# Altium PCB PCB1.PcbDoc
Units mm, origin at the board's own origin, x right, y up, seen from the top; angles counter-clockwise.
Board outline 65 x 30 mm, 4 copper layers (Top Layer, L2_GND, L3_PWR, Bottom Layer), stack 1.57 mm thick; 40 components, 29 nets, 160 pads, 43 vias.
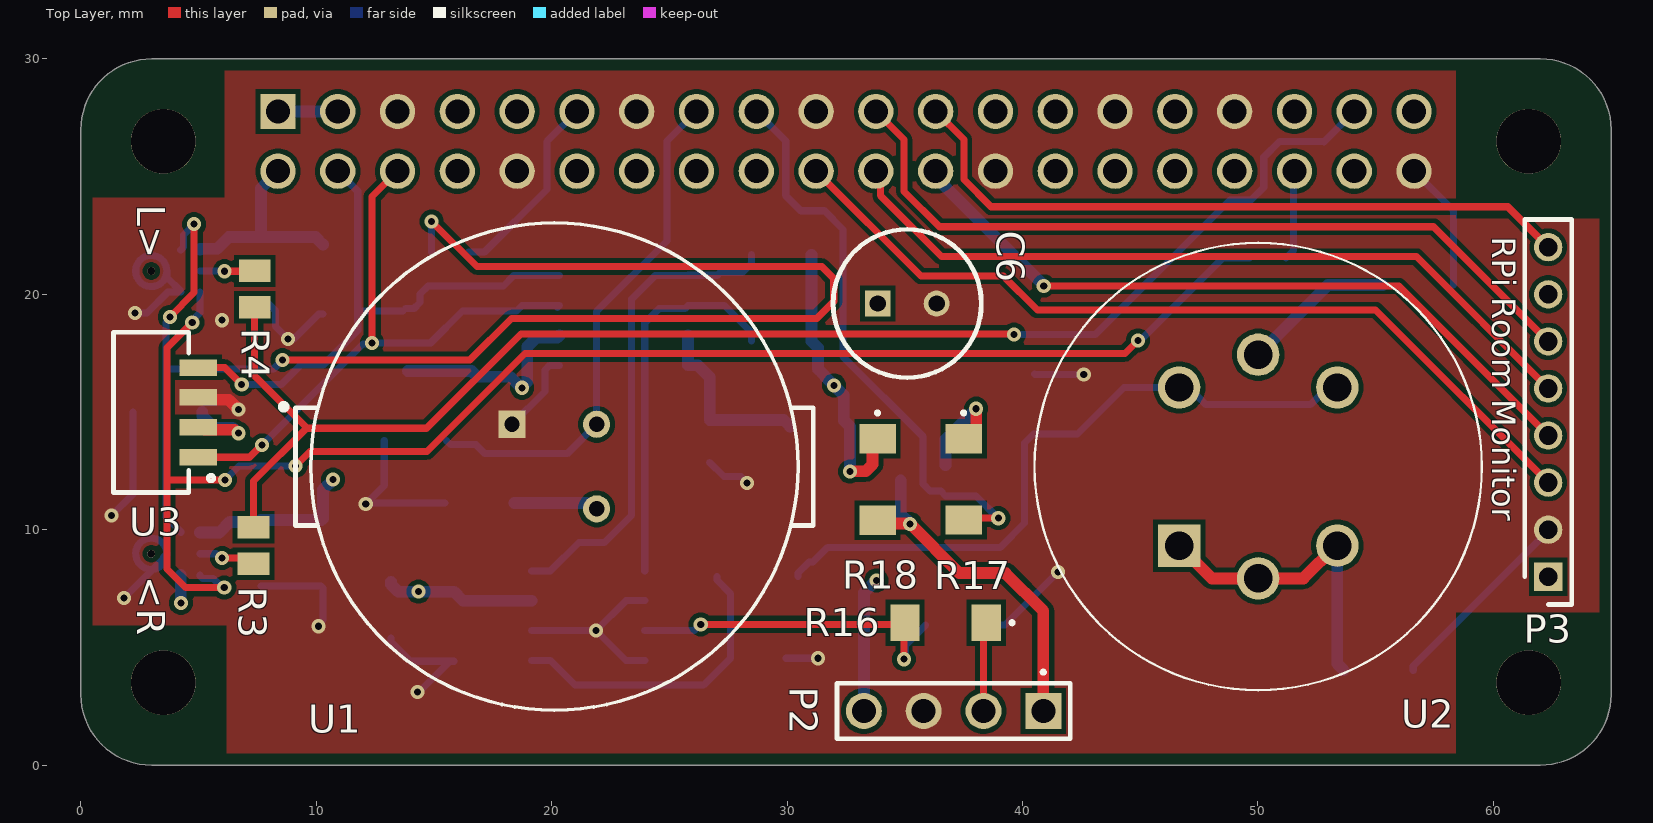
[diagram p0: Top Layer view]
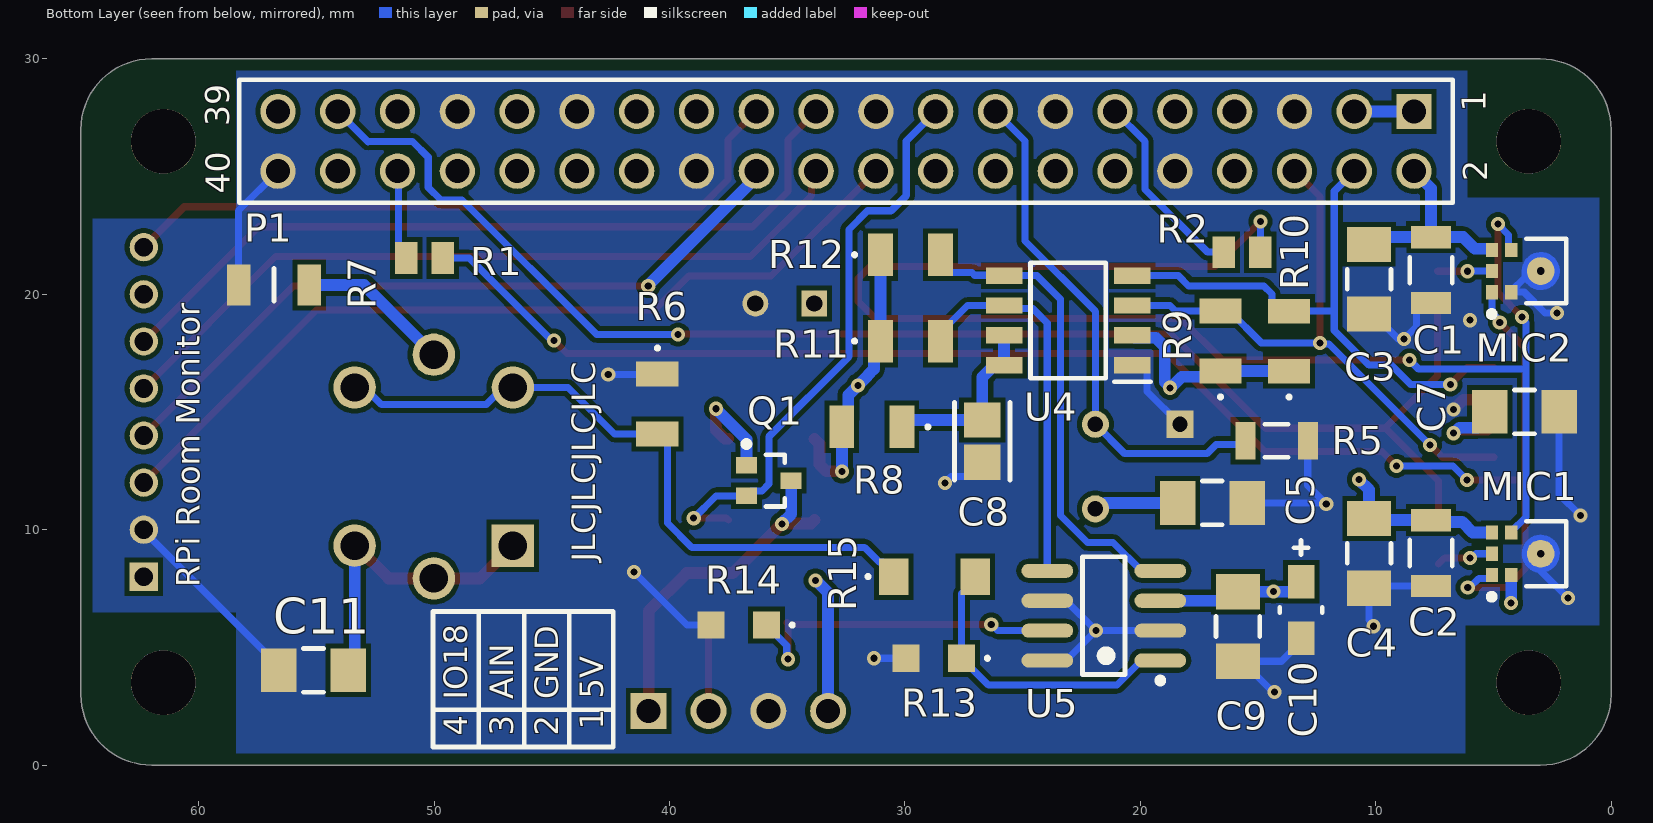
[diagram p1: Bottom Layer view, seen from below]
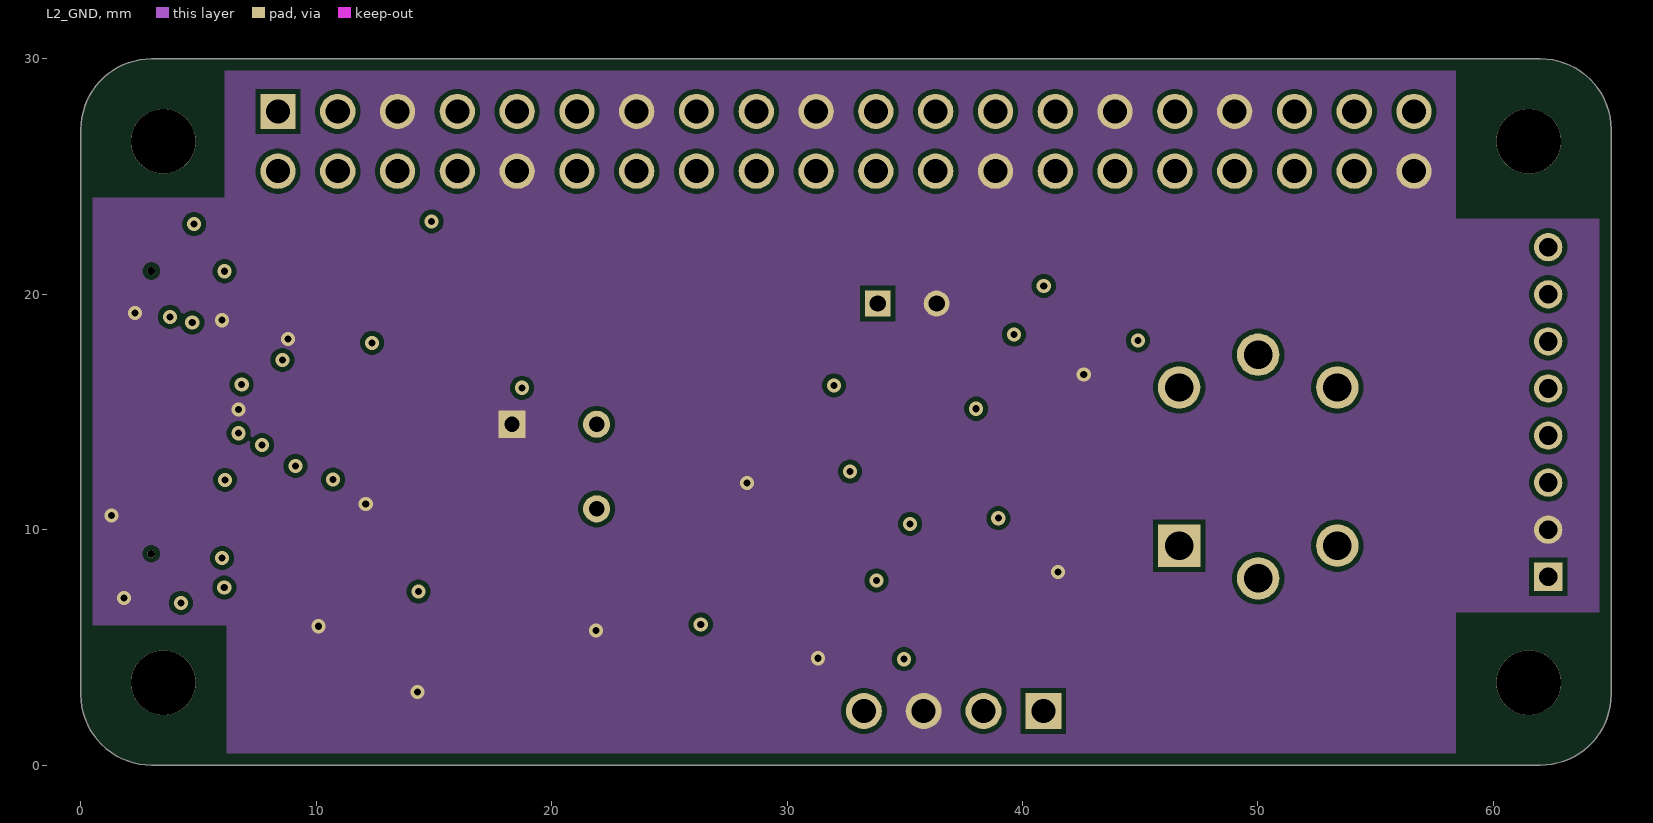
[diagram p2: L2_GND]
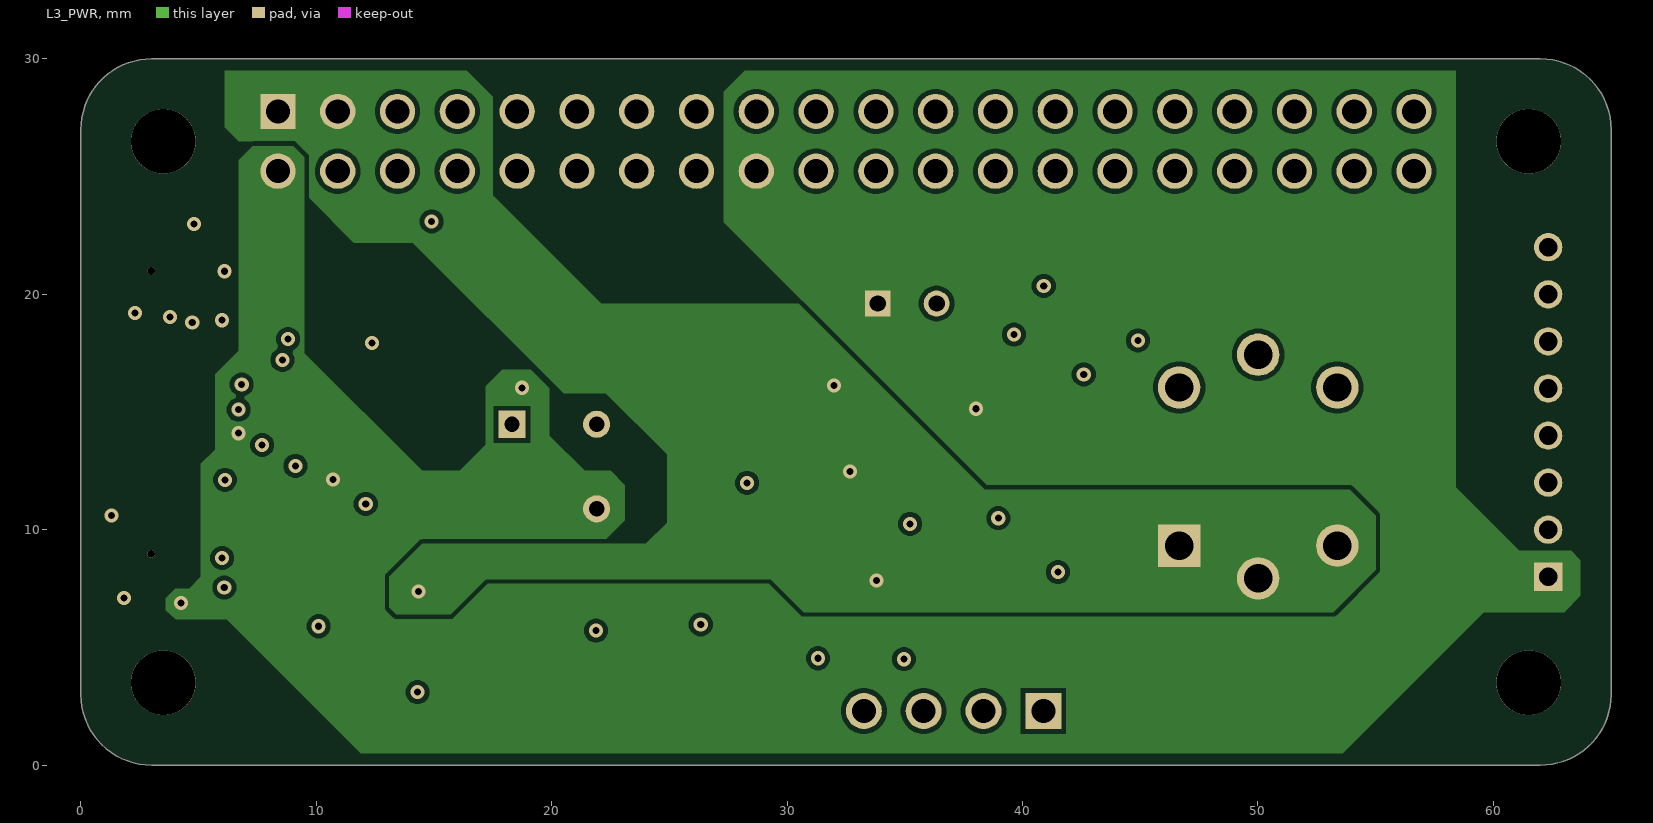
[diagram p3: L3_PWR]
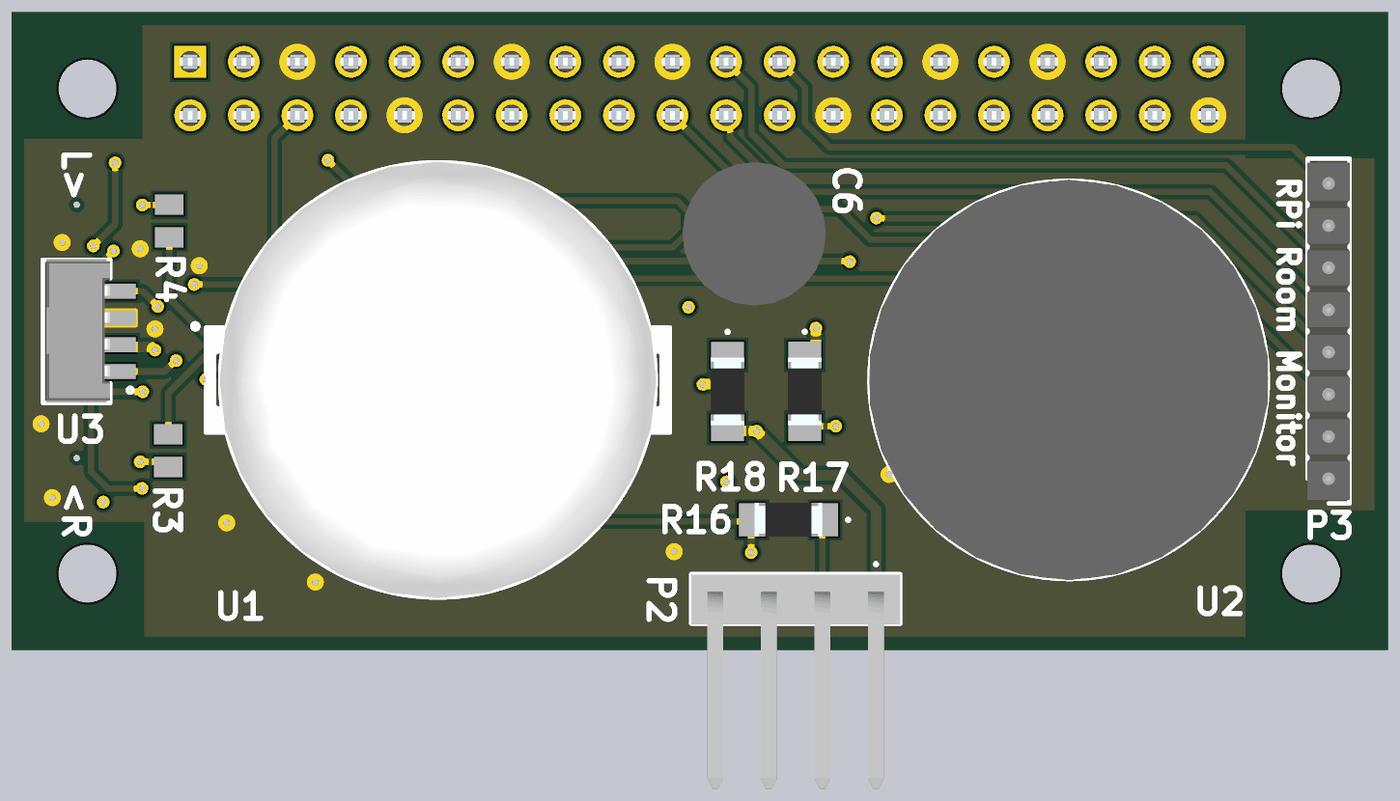
[diagram p4: 3D render of the assembled board from above, using the file's embedded part models]
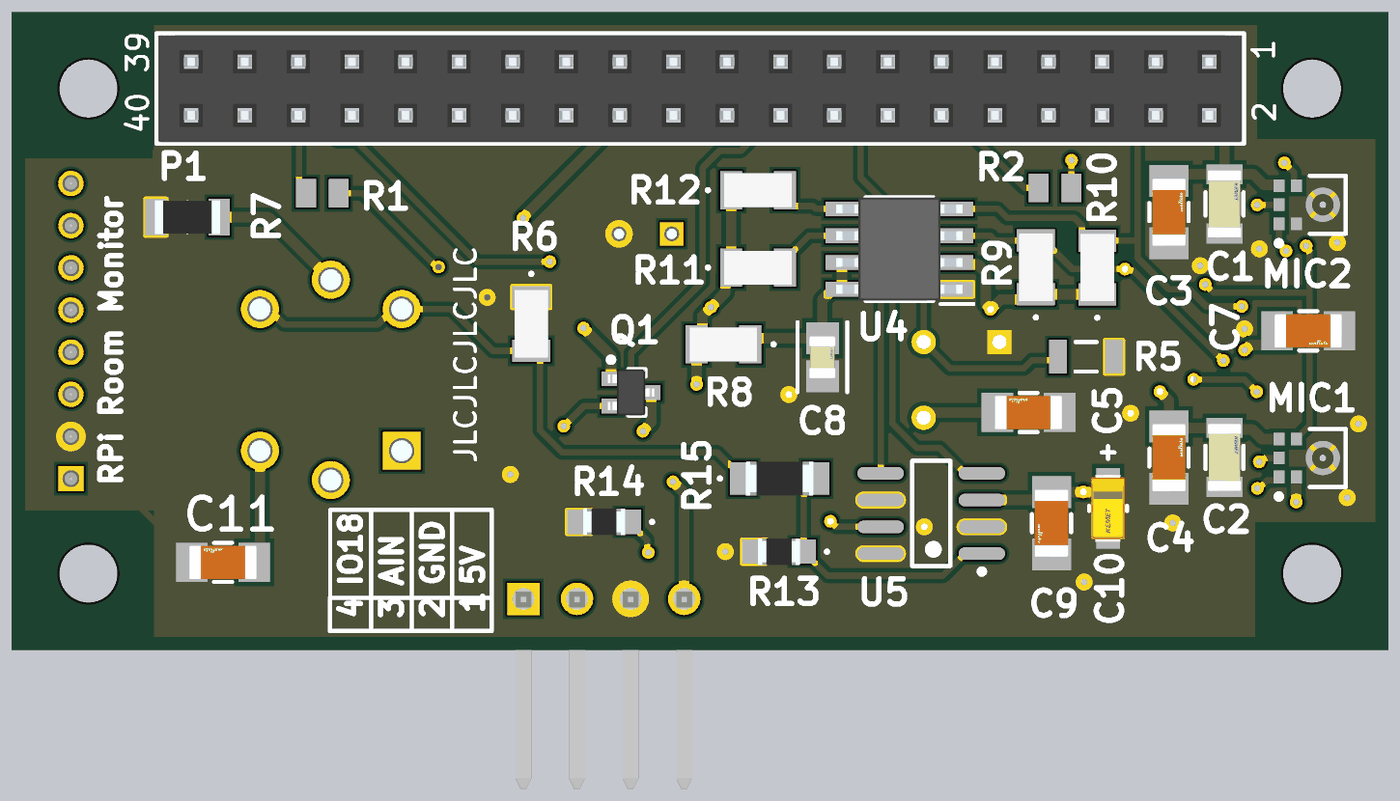
[diagram p5: 3D render of the assembled board from below, using the file's embedded part models]

## Layer stack, top to bottom
Top Solder: solder mask 0.015, Solder Resist, Dk 3.8
Top Layer: signal copper 0.035
Dielectric 2: prepreg 0.2, 7628, Dk 4.6
L2_GND: signal copper 0.0175
Dielectric 1: dielectric 1.065, FR-4, Dk 4.5
L3_PWR: signal copper 0.0175
Dielectric 3: prepreg 0.2, 7628, Dk 4.6
Bottom Layer: signal copper 0.035
Bottom Solder: solder mask 0.015, Solder Resist, Dk 3.8

## Board outline
0,3 0,27 cw(c3,27) 3,30 62,30 cw(c62,27) 65,27 65,3 cw(c62,3) 62,0 3,0 cw(c3,3)

## Design rules (kind name [scope] priority, off if disabled: settings)
BoardOutlineClearance [All] p1: gap=0.2 ignorepadtopadclearanceinfootprint=FALSE except(0.4: Arc-SplitBarrior Arc-SplitContinuation Track-SplitBarrior Track-SplitContinuation SMDPad-SplitBarrior SMDPad-SplitContinuation THPad-SplitBarrior THPad-SplitContinuation Via-SplitBarrior Via-SplitContinuation Fill-SplitBarrior Fill-SplitContinuation Poly-SplitBarrior Poly-SplitContinuation Region-SplitBarrior Region-SplitContinuation Text-SplitBarrior Text-SplitContinuation)
Clearance "Clearance Bottom Layer" [OnLayer('Bottom Layer')] p1: gap=0.2 ignorepadtopadclearanceinfootprint=TRUE except(0.254: Arc-Text Track-Text SMDPad-Text THPad-Text Via-Text Fill-Text Poly-Text Region-Text Text-Text)
Clearance "Clearance Top Layer" [OnLayer('Top Layer')] p2: gap=0.2 ignorepadtopadclearanceinfootprint=TRUE except(0.254: Arc-Text Track-Text SMDPad-Text THPad-Text Via-Text Fill-Text Poly-Text Region-Text Text-Text)
Clearance [All] p3: gap=0.2 ignorepadtopadclearanceinfootprint=FALSE except(0.089: Arc-Arc Arc-Track Arc-SMDPad Track-Track Track-SMDPad SMDPad-SMDPad; 0.127: Arc-Via Track-Via SMDPad-Via THPad-Via Via-Via; 0.254: Arc-Text Track-Text SMDPad-Text THPad-Text Via-Text Fill-Text Poly-Text Region-Text Text-Text)
HoleSize [All] p1: absolutevalues=TRUE maxlimit=6.3 minlimit=0.2 maxpercent=80.000 minpercent=20.000
MinimumAnnularRing [All] p1: minimumring=0.076
MinimumSolderMaskSliver [All] p1: minsoldermaskwidth=0.1
PlaneConnect [All] p1: planeconnectstyle=Direct reliefexpansion=0.508 reliefentries=4 reliefconductorwidth=0.254 reliefairgap=0.254
PolygonConnect PolygonConnect_1 [All] p1: connectstyle=Direct reliefconductorwidth=0.508 reliefentries=4 polygonreliefangle="90 Angle" airgapwidth=0.254
RoutingCorners [All] p1: cornerstyle=Round minsetback=2.54 maxsetback=2.54
RoutingVias [All] p1: holewidth=0.5 width=1 viastyle="Through Hole" minholewidth=0.2 minwidth=0.45 maxholewidth=1 maxwidth=2
SilkToSilkClearance [All] p1: silktosilkclearance=0.1
SilkToSolderMaskClearance [IsPad] p1: minsilkscreentomaskgap=0.1 clearancetoexposedcopper=TRUE
SolderMaskExpansion [All] p1: expansion=0.102 istentingtop=FALSE
Width [All] p1: maxlimit=2.54 minlimit=0.089 preferedwidth=0.381
24 further rules are at their usual default settings.

## Components (designator, comment, footprint, x,y, rotation, side; value= is the part's Value field where it differs from the comment)
C1 "C1206C201F4HACTU" FP-C1206C-EB-MFG 7.65,21.03 r270 bottom
C2 "C1206C201F4HACTU" FP-C1206C-EB-MFG 7.65,9.01 r270 bottom
C3 "GRM3195C1H104GA05D" FP-GRM319-0_15-IPC_A 10.28,20.64 r90 bottom
C4 "GRM3195C1H104GA05D" FP-GRM319-0_15-IPC_A 10.28,9 r90 bottom
C5 "GRM3195C1H104GA05D" FP-GRM319-0_15-IPC_A 16.94,11.14 r0 bottom
C6 "ECE-A0JKS101B" CAPPRD250W50D630H600 33.85,19.61 r0 top
C7 "GRM3195C1H104GA05D" FP-GRM319-0_15-IPC_A 3.68,15.01 r180 bottom
C8 "C0805C101F3HACTU" FP-C0805C-DN-IPC_A 26.71,13.76 r270 bottom
C9 "GRM3195C1H104GA05D" FP-GRM319-0_15-IPC_A 15.85,5.89 r270 bottom
C10 "T491A106K020AT" FP-T491A106K020AT-MFG 13.17,6.59 r90 bottom
C11 "GRM3195C1H104GA05D" FP-GRM319-0_15-IPC_A 55.12,4.03 r0 bottom
MIC1 "SPH0645LM4H-B" FP-SPH0645LM4H-B-MFG#1 3.699,8.98 r90 bottom
MIC2 "SPH0645LM4H-B" FP-SPH0645LM4H-B-MFG#2 3.699,20.99 r90 bottom
P1 "61304021821" 61304021821 32.5,26.5 r0 bottom locked
P2 "22-05-2041" 22052041 40.88,2.3 r180 top
P3 "M22-2010805" HDRV8W60P0X200_1X8_1600X200X525P 62.33,8 r90 top
Q1 "BSS138W-7-F" DIOD-SOT323-3_V 35.78,12.09 r180 bottom
R1 "ERJ-6ENF51R0V" RESC2013X70X40LL20T20 50.41,21.54 r180 bottom
R2 "ERJ-6ENF51R0V" RESC2013X70X40LL20T20 15.68,21.79 r180 bottom
R3 "ERJ-6ENF51R0V" RESC2013X70X40LL20T20 7.33,9.33 r90 top
R4 "ERJ-6ENF51R0V" RESC2013X70X40LL20T20 7.38,20.22 r270 top
R5 "RC1206FR-07100KL" RESC3116X65X40LL10T20 14.21,13.78 r180 bottom
R6 "RCC12064K70FKEA" RCC1206_e3 40.51,15.34 r270 bottom
R7 "RC1206JR-7W2RL" RESC3116X65N 56.8,20.4 r0 bottom
R8 "RCC1206200KFKEA" RCC1206_e3 31.4,14.37 r0 bottom
R9 "RCC12062K20FKEA" RCC1206_e3 16.59,18.02 r90 bottom
R10 "RCC12062K20FKEA" RCC1206_e3 13.68,18.01 r90 bottom
R11 "RCC12062K20FKEA" RCC1206_e3 29.76,18.01 r180 bottom
R12 "RCC12062K20FKEA" RCC1206_e3 29.76,21.68 r180 bottom
R13 "ERJ-P06D6801V" ERJP06_(0805) 28.77,4.54 r0 bottom
R14 "ERJ-P06D6801V" ERJP06_(0805) 37.06,5.95 r0 bottom
R15 "ERJ-P08D1002V" ERJP08_(1206) 28.74,8.01 r180 bottom
R16 "ERJ-P08D1002V" ERJP08_(1206) 36.73,6.05 r180 top
R17 "ERJ-P08D1002V" ERJP08_(1206) 37.5,12.14 r270 top
R18 "ERJ-P08D1002V" ERJP08_(1206) 33.84,12.135 r270 top
U1 "EKMC1603111" FP-EKMC1603111-MFG 20.112,12.684 r0 top locked
U2 "SEN-17049" SEN17049 46.651,9.325 r90 top locked
U3 "VEML7700-TT" VEML7700 3.06,15.01 r90 top
U4 "PCA9306D,118" SOIC127P600X175-8N 23.06,18.89 r0 bottom
U5 "MCP3422A1-E/SN" SOIC-SN8_N 21.55,6.35 r0 bottom

## Footprints (in the part's own frame and the unit in brackets; to place one, negate y for a bottom-side part, rotate by r counter-clockwise, add the part's x,y. Pads: shape width x height; smd on the part's side, far side on the other; paste and mask are expansions set on the pad)
22052041 [mm]
  rect 1.53x1.53 hole 1.02: 1(0,0)
  round 1.53 hole 1.02: 2(2.54,0) 3(5.08,0) 4(7.62,0)
  silkscreen extent -1.14,-1.7 8.76,1.18, body extent -1.14,-1.15 8.76,9.02, height 6.3
61304021821 [mm] "Socket Header, Pitch 2.54 mm, THT, Vertical, dual row, 40p"
  rect 1.5x1.5 hole 1.02: 1(-24.13,-1.27)
  round 1.5 hole 1.02: 2(-24.13,1.27) 3(-21.59,-1.27) 4(-21.59,1.27) 5(-19.05,-1.27) 6(-19.05,1.27) 7(-16.51,-1.27) 8(-16.51,1.27) 9(-13.97,-1.27) 10(-13.97,1.27) 11(-11.43,-1.27) 12(-11.43,1.27) 13(-8.89,-1.27) 14(-8.89,1.27) 15(-6.35,-1.27) 16(-6.35,1.27) 17(-3.81,-1.27) 18(-3.81,1.27) 19(-1.27,-1.27) 20(-1.27,1.27) 21(1.27,-1.27) 22(1.27,1.27) 23(3.81,-1.27) 24(3.81,1.27) 25(6.35,-1.27) 26(6.35,1.27) 27(8.89,-1.27) 28(8.89,1.27) 29(11.43,-1.27) 30(11.43,1.27) 31(13.97,-1.27) 32(13.97,1.27) 33(16.51,-1.27) 34(16.51,1.27) 35(19.05,-1.27) 36(19.05,1.27) 37(21.59,-1.27) 38(21.59,1.27) 39(24.13,-1.27) 40(24.13,1.27)
  silkscreen extent -25.78,-2.62 25.78,2.62, body extent -25.65,-2.54 25.65,2.54, height 8.45
CAPPRD250W50D630H600 [mm]
  rect 1.1x1.1 hole 0.7: 1(0,0)
  round 1.1 hole 0.7: 2(2.5,0)
  silkscreen extent -1.9,-3.15 4.4,3.15, body extent -2.15,-3.4 4.65,3.4, height 6
DIOD-SOT323-3_V [mm] "SOT323, 3-Leads, Body 2.2x1.35mm, Pitch 0.65mm"
  rect 0.9x0.7 smd: 1(-0.95,0.65) 2(-0.95,-0.65) 3(0.95,0)
  silkscreen extent -1.08,-1.1 0.67,1.67, body extent -1.1,-1.1 1.1,1.1, height 1.07
ERJP06_(0805) [mm]
  rect 1.15x1.15 smd: 1(-1.175,0) 2(1.175,0)
  silkscreen extent -2.32,-0.05 -2.22,0.05, body extent -1,-0.63 1,0.63, height 0.6
ERJP08_(1206) [mm]
  rect 1.25x1.55 smd: 1(-1.725,0) 2(1.725,0)
  silkscreen extent -2.88,-0.05 -2.78,0.05, body extent -1.6,-0.8 1.6,0.8, height 0.6
FP-C0805C-DN-IPC_A [mm]
  rect 1.505x1.556 smd paste+0 mask+0: 1(-0.901,0) 2(0.901,0)
  silkscreen extent -1.65,-1.18 1.65,1.18, body extent -1,-0.63 1,0.63, height 0.88
FP-C1206C-EB-MFG [mm]
  rect 0.95x1.7 smd paste+0 mask+0: 1(-1.4,0) 2(1.4,0)
  silkscreen extent -0.55,-0.9 0.55,0.9, body extent -1.6,-0.8 1.6,0.8, height 0.88
FP-EKMC1603111-MFG [mm]
  rect 1.15x1.15 hole 0.65 paste-1000 mask+0: 1(-1.796,1.796)
  round 1.15 hole 0.65 paste-1000 mask+0: 2(1.796,1.796) 3(1.796,-1.796)
  silkscreen extent -11.62,-10.35 11,10.35, body extent -11.1,-10.45 11.1,10.45, height 0.25
FP-GRM319-0_15-IPC_A [mm]
  rect 1.506x1.858 smd paste+0 mask+0: 1(-1.476,0) 2(1.476,0)
  silkscreen extent -0.42,-0.93 0.42,0.93, body extent -1.6,-0.8 1.6,0.8, height 0.95
FP-SPH0645LM4H-B-MFG#1 [mm]
  rect 0.6x0.522 smd paste+0 mask+0: 1(-0.9,1.364) 2(-0.9,0.542) 4(0.9,0.542) 5(0.9,1.364) 6(0,1.364)
  round 1.177 smd paste-1000 mask-1000: 3(0,-0.71)
  round 0.325 hole 0.325 unplated paste-1000 mask+0: ""(0,-0.71)
  Top Layer lines w0.3: -0.659,-0.644 ccw(c0,-0.71) 0,-0.048 ccw(c0,-0.71) -0.659,-0.644
  silkscreen extent -1.95,-1.8 1.38,1.5
FP-SPH0645LM4H-B-MFG#2 [mm]
  rect 0.6x0.522 smd paste+0 mask+0: 1(-0.9,1.364) 2(-0.9,0.542) 4(0.9,0.542) 5(0.9,1.364) 6(0,1.364)
  round 1.177 smd paste-1000 mask-1000: 3(0,-0.71)
  round 0.325 hole 0.325 unplated paste-1000 mask+0: ""(0,-0.71)
  Top Layer circle w0.3: c0,-0.71 r0.662
  silkscreen extent -1.95,-1.8 1.38,1.5
FP-T491A106K020AT-MFG [mm]
  rect 1.42x1.13 smd paste+0 mask+0: 1(-1.2,0) 2(1.2,0)
  silkscreen extent -0.12,-0.9 2.95,0.9, body extent -1.6,-0.8 1.6,0.8, height 1.8
HDRV8W60P0X200_1X8_1600X200X525P [mm]
  rect 1.2x1.2 hole 0.8: 1(0,0)
  round 1.2 hole 0.8: 2(2,0) 3(4,0) 4(6,0) 5(8,0) 6(10,0) 7(12,0) 8(14,0)
  silkscreen extent -1.17,-1 15.17,1, body extent -1,-1 15,1, height 5.25
RCC1206_e3 [mm]
  rect 1.05x1.8 smd: 1(-1.275,0) 2(1.275,0)
  silkscreen extent -2.42,-0.05 -2.33,0.05, body extent -1.6,-0.8 1.6,0.8, height 0.55
RESC2013X70X40LL20T20 [mm] "Chip Resistor, 2-Leads, Body 2.00x1.25mm, IPC High Density"
  rect 0.95x1.35 smd: 1(-0.775,0) 2(0.775,0)
  body extent -1.1,-0.72 1.1,0.72, height 0.7
RESC3116X65N [mm]
  rect 1x1.75 smd: 1(-1.5,0) 2(1.5,0)
  silkscreen extent 0,-0.7 0,0.7, body extent -1.55,-0.8 1.55,0.8, height 0.65
RESC3116X65X40LL10T20 [mm] "Chip Resistor, 2-Leads, Body 3.10x1.60mm, IPC High Density"
  rect 0.85x1.6 smd: 1(-1.325,0) 2(1.325,0)
  silkscreen extent -0.5,-0.7 0.5,0.7, body extent -1.6,-0.85 1.6,0.85, height 0.65
SEN17049 [mm]
  rect 1.8x1.8 hole 1.2: 1(0,0)
  round 1.8 hole 1.2: 2(-1.391,-3.359) 3(0,-6.718) 4(6.718,-6.718) 5(8.109,-3.359) 6(6.718,0)
  silkscreen extent -6.14,-12.86 12.86,6.14, body extent -6.14,-12.86 12.86,6.14, height 20.1
SOIC127P600X175-8N [mm]
  rect 1.55x0.7 smd: 1(-2.725,1.905) 2(-2.725,0.635) 3(-2.725,-0.635) 4(-2.725,-1.905) 5(2.725,-1.905) 6(2.725,-0.635) 7(2.725,0.635) 8(2.725,1.905)
  silkscreen extent -3.5,-2.45 1.6,2.61, body extent -3,-2.45 3,2.45, height 1.75
SOIC-SN8_N [mm] "SOIC, 8-Leads, Body 4.9x3.9mm, Pitch 1.27mm, IPC Medium Density"
  oval 2.2x0.6 smd: 1(-2.4,1.905) 2(-2.4,0.635) 3(-2.4,-0.635) 4(-2.4,-1.905) 5(2.4,-1.905) 6(2.4,-0.635) 7(2.4,0.635) 8(2.4,1.905)
  silkscreen extent -2.52,-2.5 0.9,2.88, body extent -2,-2.5 2,2.5, height 1.75
VEML7700 [mm]
  rect 0.7x1.6 smd: 1(-1.93,-1.925) 2(-0.66,-1.925) 3(0.61,-1.925) 4(1.88,-1.925)
  silkscreen extent -3.42,-2.59 3.37,1.68, body extent -3.4,-1.5 3.4,1.5, height 2.36

## Part data
C1 C2: Capacitance=200pF, Manufacturer=KEMET, Supplier Part Number 1=80-C1206C201F4HACTU, Category="Ceramic Capacitors", Manufacturer Part Number=C1206C201F4HACTU, Pricing 1="1=0,41000, 10=0,27900, 50=0,27900, 100=0,16700, 1000=0,11500, 10000=0,09500 (USD)", RoHS=Yes, RoHS Compliant=Yes, Stock 1=3719, Supplier 1=Mouser
C3 C4 C5 C7 C9 C11: "Multi-Layer Ceramic Capacitor 0.1uF C0G 2% 1206 Paper T/R", Capacitance=0.1uF, Manufacturer=Murata, Supplier Part Number 1=81-GRM3195C1H104GA5D, Category="Ceramic Capacitors", Manufacturer Part Number=GRM3195C1H104GA05D, Pricing 1="1=0,69000, 10=0,51100, 50=0,51100, 100=0,35000, 500=0,27800, 1000=0,25100, 2000=0,21300, 10000=0,21300 (USD)", RoHS=Yes, RoHS Compliant=Yes, Stock 1=17820, Supplier 1=Mouser
C6: "Cap Aluminum 100uF 6.3V 20% (6.3 X 5mm) Radial 5mm 71mA 1000 hr 85°C Ammo Pack", Capacitance=100uF, Case/Package=Radial, Manufacturer=Panasonic, Max Operating Temperature=85°C, Min Operating Temperature=-40°C, Package Quantity=2000, Ripple Current=71mA, Supplier Part Number 1=667-ECE-A0JKS101B, Tolerance=20%, Voltage Rating=6.3V, Category="Aluminum Electrolytic Capacitors", ComponentLink1Description=https://datasheet.ciiva.com/24066/a-e-461514-24066346.pdf?src-supplier=Mouser, ComponentLink1URL=https://datasheet.ciiva.com/24066/a-e-461514-24066346.pdf?src-supplier=Mouser, ComponentLink2Description=https://datasheet.ciiva.com/11680/aba0000ce15-11680725.pdf?src-supplier=Avnet, ComponentLink2URL=https://datasheet.ciiva.com/11680/aba0000ce15-11680725.pdf?src-supplier=Avnet, ComponentLink3Description=https://datasheet.ciiva.com/17536/aba0000ce15-17536026.pdf?src-supplier=Avnet+Europe, ComponentLink3URL=https://datasheet.ciiva.com/17536/aba0000ce15-17536026.pdf?src-supplier=Avnet+Europe, Construction=RADIAL, Contact Plating=Tin, Diameter=6.3mm, Height=5mm, Height - Seated (Max)=0.236inch, Lead Diameter=0.45mm, Lead Pitch=5mm, Length=5mm, Life (Hours)=1000Hour, Manufacturer Part Number=ECE-A0JKS101B, Mount="Through Hole", Packaging="Tape and Reel", Pricing 1="1=0,36000, 10=0,24500, 50=0,16400, 100=0,14000, 1000=0,09900, 10000=0,07500 (USD)", Radiation Hardening=No, RoHS=Yes, RoHS Compliant=Yes, Series=KS, Stock 1=2081, Supplier 1=Mouser, Termination=Radial, Voltage Rating (DC)=6.3V
C8: "100.pf 25.0V Rohs Compliant: Yes", Capacitance=100pF, Manufacturer=KEMET, Supplier Part Number 1=80-C0805C101F3HACTU, Category="Ceramic Capacitors", Manufacturer Part Number=C0805C101F3HACTU, Pricing 1="1=0,30000, 10=0,20400, 50=0,20400, 100=0,10400, 1000=0,06200, 10000=0,05400 (USD)", RoHS=Yes, RoHS Compliant=Yes, Stock 1=6773, Supplier 1=Mouser
C10: "Cap Tant Solid 10uF 20V A CASE 10% (3.2 X 1.6 X 1.6mm) Inward L SMD 3216-18 5 Ohm 125°C T/R", Capacitance=10uF, Case/Package=3216-18, Manufacturer=KEMET, Supplier Part Number 1=80-T491A106K020AT, Tolerance=10%, Category="Tantalum Capacitors", ComponentLink1Description=https://4donline.ihs.com/images/VipMasterIC/IC/KEME/KEME-S-A0006487387/KEME-S-A0006487387-1.pdf?hkey=52A5661711E402568146F3353EA87419&src-supplier=Element14, ComponentLink1URL=https://4donline.ihs.com/images/VipMasterIC/IC/KEME/KEME-S-A0006487387/KEME-S-A0006487387-1.pdf?hkey=52A5661711E402568146F3353EA87419&src-supplier=Element14, ComponentLink2Description=https://4donline.ihs.com/images/VipMasterIC/IC/KEME/KEME-S-A0006487387/KEME-S-A0006487387-1.pdf?hkey=52A5661711E402568146F3353EA87419&src-supplier=Farnell, ComponentLink2URL=https://4donline.ihs.com/images/VipMasterIC/IC/KEME/KEME-S-A0006487387/KEME-S-A0006487387-1.pdf?hkey=52A5661711E402568146F3353EA87419&src-supplier=Farnell, ComponentLink3Description=https://4donline.ihs.com/images/VipMasterIC/IC/KEME/KEME-S-A0006487387/KEME-S-A0006487387-1.pdf?hkey=52A5661711E402568146F3353EA87419&src-supplier=Newark, ComponentLink3URL=https://4donline.ihs.com/images/VipMasterIC/IC/KEME/KEME-S-A0006487387/KEME-S-A0006487387-1.pdf?hkey=52A5661711E402568146F3353EA87419&src-supplier=Newark, ComponentLink4Description=https://api.kemet.com/component-edge/download/datasheet/T491A106K020AT.pdf?src-supplier=Digi-Key, ComponentLink4URL=https://api.kemet.com/component-edge/download/datasheet/T491A106K020AT.pdf?src-supplier=Digi-Key, Height=1.6mm, Lead Free="Lead Free", Length=3.2mm, Manufacturer Part Number=T491A106K020AT, Pricing 1="1=0,70000, 10=0,49300, 50=0,37300, 100=0,32500, 1000=0,31800, 10000=0,19100 (USD)", RoHS=Yes, RoHS Compliant=Yes, Stock 1=134225, Supplier 1=Mouser, Width=1.6mm
MIC1 MIC2: "Crawford Mic Dgt I2S Bottom Port", Manufacturer=Knowles, Operating Supply Current=600uA, Supplier Part Number 1=721-SPH0645LM4H-B, Voltage Rating=1.8V, Category=Microphones, ComponentLink1Description=https://media.digikey.com/pdf/Data%20Sheets/Knowles%20Acoustics%20PDFs/SPH0645LM4H-B.pdf?src-supplier=Digi-Key, ComponentLink1URL=https://media.digikey.com/pdf/Data%20Sheets/Knowles%20Acoustics%20PDFs/SPH0645LM4H-B.pdf?src-supplier=Digi-Key, Direction=Omnidirectional, Height=1.08mm, Length=3.5mm, Manufacturer Part Number=SPH0645LM4H-B, Output Type=Digital, Packaging="Tape and Reel", Pricing 1="1=2,91000, 10=2,42000, 25=2,23000, 50=2,10000, 100=1,97000, 500=1,71000, 1000=1,67000, 10000=1,67000 (USD)", RoHS=Yes, RoHS Compliant=Yes, Shape=Rectangular, Stock 1=19165, Supplier 1=Mouser, Termination=Solder, Width=2.65mm
P1: "THT Vertical Socket Header WR-PHD, Pitch 2.54 mm, Dual Row, 40 pins", Manufacturer="Wurth Electronics", Supplier Part Number 1=710-61304021821, Contact Material="Copper Alloy", Gender=Female, Manufacturer Part Number=61304021821, Pricing 1="1=1,92000, 10=1,76000, 50=1,57000, 100=1,37000, 1000=1,27000, 10000=1,27000 (USD)", RoHS=Yes, RoHS Compliant=Yes, Stock 1=6022, Supplier 1=Mouser
P2: "Connector Unshrouded Header 4 Position 2.54mm Solder Right Angle Thru-Hole Bulk", Manufacturer=Molex, Supplier Part Number 1=538-22-05-2041, Category="Headers and Wire Housings", ComponentLink1Description=https://datasheet.ciiva.com/3934/344080022052041-pcb-headers-3934066.pdf?src-supplier=Arrow+Electronics, ComponentLink1URL=https://datasheet.ciiva.com/3934/344080022052041-pcb-headers-3934066.pdf?src-supplier=Arrow+Electronics, ComponentLink2Description=https://datasheet.ciiva.com/1479/022052031-sd-1479057.pdf?src-supplier=Newark, ComponentLink2URL=https://datasheet.ciiva.com/1479/022052031-sd-1479057.pdf?src-supplier=Newark, ComponentLink3Description=https://datasheet.ciiva.com/11747/0900766b80027334-11747944.pdf?src-supplier=RSComponents, ComponentLink3URL=https://datasheet.ciiva.com/11747/0900766b80027334-11747944.pdf?src-supplier=RSComponents, ComponentLink4Description=https://datasheet.ciiva.com/30116/37900022052041-pcb-headers-30116714.pdf?src-supplier=Onlinecomponents.com, ComponentLink4URL=https://datasheet.ciiva.com/30116/37900022052041-pcb-headers-30116714.pdf?src-supplier=Onlinecomponents.com, ComponentLink5Description=https://datasheet.ciiva.com/19462/878673-19462259.pdf?src-supplier=Jameco, ComponentLink5URL=https://datasheet.ciiva.com/19462/878673-19462259.pdf?src-supplier=Jameco, ComponentLink6Description=https://datasheet.ciiva.com/5155/0022052041-pcb-headers-158320-5155332.pdf?src-supplier=Mouser, ComponentLink6URL=https://datasheet.ciiva.com/5155/0022052041-pcb-headers-158320-5155332.pdf?src-supplier=Mouser, ComponentLink7Description=https://datasheet.ciiva.com/7843/7386-7843894.pdf?src-supplier=Element14, ComponentLink7URL=https://datasheet.ciiva.com/7843/7386-7843894.pdf?src-supplier=Element14, ComponentLink8Description=https://datasheet.ciiva.com/1433/1848135-1433606.pdf?src-supplier=Element14, ComponentLink8URL=https://datasheet.ciiva.com/1433/1848135-1433606.pdf?src-supplier=Element14, ComponentLink9Description=https://datasheet.ciiva.com/10088/0022052041-pcb-headers-10088858.pdf?src-supplier=Avnet, ComponentLink9URL=https://datasheet.ciiva.com/10088/0022052041-pcb-headers-10088858.pdf?src-supplier=Avnet, Manufacturer Part Number=22-05-2041, Pricing 1="1=0,31000, 10=0,27800, 50=0,27800, 100=0,20300, 1000=0,18600, 10000=0,15600 (USD)", RoHS=Yes, Stock 1=215, Supplier 1=Mouser
P3: "Connector, Header, 8Pos, 1Row, 2Mm Rohs Compliant: Yes", Case/Package=SIL, Color=Black, Contact Resistance=20mR, Current Rating=1A, Flammability Rating="UL94 V-0", Insulation Resistance=10GR, Manufacturer=Harwin, Max Operating Temperature=105°C, Min Operating Temperature=-55°C, Package Quantity=1000, Supplier Part Number 1=855-M22-2010805, Voltage Rating=650V, Category="Headers and Wire Housings", ComponentLink1Description=https://datasheet.ciiva.com/11751/0900766b800345c0-11751285.pdf?src-supplier=RSComponents, ComponentLink1URL=https://datasheet.ciiva.com/11751/0900766b800345c0-11751285.pdf?src-supplier=RSComponents, ComponentLink2Description=https://datasheet.ciiva.com/9479/m22-201-9479493.pdf?src-supplier=Avnet, ComponentLink2URL=https://datasheet.ciiva.com/9479/m22-201-9479493.pdf?src-supplier=Avnet, ComponentLink3Description=https://datasheet.ciiva.com/6814/m22-201-6814953.pdf?src-supplier=Digi-Key, ComponentLink3URL=https://datasheet.ciiva.com/6814/m22-201-6814953.pdf?src-supplier=Digi-Key, Connector Type="Male Pin", Contact Material=Bronze, Contact Mating Length=0.138inch, Contact Plating=Gold, Contact Type="Male Pin", Depth=2mm, Housing Color=Black, Housing Material=Nylon, Length=16mm, Manufacturer Part Number=M22-2010805, Max Current Rating=1A, Mount="Through Hole", Number of Contacts=8, Number of Positions=8, Number of Rows=1, Orientation=Straight, Packaging=Bulk, Pitch=2mm, Pricing 1="1=0,57000, 10=0,44500, 50=0,44500, 100=0,38500, 1000=0,28800, 10000=0,23600 (USD)", Radiation Hardening=No, REACH SVHC="No SVHC", RoHS=Yes, RoHS Compliant=Yes, Series=M22, Stock 1=686, Supplier 1=Mouser, Termination=Solder
Q1: "N沟道 VDS=50V VGS=±20V ID=200mA P=200mW", Case/Package=SOT-323, Continuous Drain Current (ID)=200mA, Drain to Source Breakdown Voltage=75V, Drain to Source Resistance=1.4R, Drain to Source Voltage (Vdss)=50V, Drain-source On Resistance-Max=3.5R, Gate to Source Voltage (Vgs)=20V, Input Capacitance=50pF, Manufacturer=Diodes, Max Operating Temperature=150°C, Max Power Dissipation=200mW, Min Operating Temperature=-55°C, Package Quantity=3000, Supplier Part Number 1=621-BSS138W-F, Threshold Voltage=1.2V, Category=MOSFETs, ComponentLink1Description=https://datasheet.ciiva.com/19479/1589937-19479882.pdf?src-supplier=Jameco, ComponentLink1URL=https://datasheet.ciiva.com/19479/1589937-19479882.pdf?src-supplier=Jameco, ComponentLink2Description=https://datasheet.ciiva.com/4442/ds30206-79208-4442805.pdf?src-supplier=Mouser, ComponentLink2URL=https://datasheet.ciiva.com/4442/ds30206-79208-4442805.pdf?src-supplier=Mouser, ComponentLink3Description=https://datasheet.ciiva.com/8115/ds30206-8115376.pdf?src-supplier=Avnet, ComponentLink3URL=https://datasheet.ciiva.com/8115/ds30206-8115376.pdf?src-supplier=Avnet, ComponentLink4Description=https://datasheet.ciiva.com/17099/bss138w-7-f-17099411.pdf?src-supplier=Allied+Electronics, ComponentLink4URL=https://datasheet.ciiva.com/17099/bss138w-7-f-17099411.pdf?src-supplier=Allied+Electronics, ComponentLink5Description=https://datasheet.ciiva.com/1190/ds30206-1190191.pdf?src-supplier=Element14, ComponentLink5URL=https://datasheet.ciiva.com/1190/ds30206-1190191.pdf?src-supplier=Element14, ComponentLink6Description=https://datasheet.ciiva.com/8115/ds30206-8115303.pdf?src-supplier=Avnet, ComponentLink6URL=https://datasheet.ciiva.com/8115/ds30206-8115303.pdf?src-supplier=Avnet, ComponentLink7Description=https://datasheet.ciiva.com/941/ds30206-941177.pdf?src-supplier=Digi-Key, ComponentLink7URL=https://datasheet.ciiva.com/941/ds30206-941177.pdf?src-supplier=Digi-Key, ComponentLink8Description=https://datasheet.ciiva.com/6383/ds30206-6383772.pdf?src-supplier=Digi-Key, ComponentLink8URL=https://datasheet.ciiva.com/6383/ds30206-6383772.pdf?src-supplier=Digi-Key, Contact Plating=Tin,Matte, Current Rating=200mA, Dual Supply Voltage=50V, Element Configuration=Single, Height=1mm, Lead Free="Lead Free", Length=2.2mm, Manufacturer Part Number=BSS138W-7-F, Mount="Surface Mount", Nominal Vgs=1.2V, Number of Channels=1, Number of Elements=1, Number of Pins=3, On-State Resistance=3.5R, Packaging="Tape and Reel", Polarity=N-CHANNEL, Power Dissipation=200mW, Pricing 1="1=0,32000, 10=0,26800, 50=0,26800, 100=0,14300, 500=0,09400, 1000=0,06400, 3000=0,04900, 9000=0,04200, 10000=0,04200, 24000=0,03900, 45000=0,03500 (USD)", Rds On Max=3.5R, REACH SVHC="No SVHC", RoHS=Yes, RoHS Compliant=Yes, Series=-, Stock 1=140567, Supplier 1=Mouser, Termination=SMD/SMT, Turn-Off Delay Time=20ns, Turn-On Delay Time=20ns, Voltage=50V, Voltage Rating (DC)=50V, Weight=0.000212oz, Width=1.35mm
R1 R2 R3 R4: "贴片电阻 51Ω ±1% 1/8W ±100ppm/℃ 0805", Case Code (Imperial)=0805, Case Code (Metric)=2012, Manufacturer=Panasonic, Max Operating Temperature=155°C, Max Power Dissipation=125mW, Min Operating Temperature=-55°C, Package Quantity=1, Resistance=51R, Resistance Tolerance=1%, Resistor Type="Thick Film", Supplier Part Number 1=667-ERJ-6ENF51R0V, Temperature Coefficient=100ppm/°C, Voltage Rating=150V, Case/Package=0805, Category="Chip SMD Resistors", ComponentLink1Description=https://datasheet.ciiva.com/11821/0900766b80f80784-11821666.pdf?src-supplier=RSComponents, ComponentLink1URL=https://datasheet.ciiva.com/11821/0900766b80f80784-11821666.pdf?src-supplier=RSComponents, ComponentLink2Description=https://datasheet.ciiva.com/46444/1678782-46444822.pdf?src-supplier=Element14, ComponentLink2URL=https://datasheet.ciiva.com/46444/1678782-46444822.pdf?src-supplier=Element14, ComponentLink3Description=https://datasheet.ciiva.com/24069/aoa0000ce2-24069916.pdf?src-supplier=Mouser, ComponentLink3URL=https://datasheet.ciiva.com/24069/aoa0000ce2-24069916.pdf?src-supplier=Mouser, ComponentLink4Description=https://datasheet.ciiva.com/16787/70260748-16787022.pdf?src-supplier=Allied+Electronics, ComponentLink4URL=https://datasheet.ciiva.com/16787/70260748-16787022.pdf?src-supplier=Allied+Electronics, ComponentLink5Description=https://datasheet.ciiva.com/16786/70260748-16786149.pdf?src-supplier=Allied+Electronics, ComponentLink5URL=https://datasheet.ciiva.com/16786/70260748-16786149.pdf?src-supplier=Allied+Electronics, ComponentLink6Description=https://datasheet.ciiva.com/9189/aoa0000ce2-9189048.pdf?src-supplier=Avnet, ComponentLink6URL=https://datasheet.ciiva.com/9189/aoa0000ce2-9189048.pdf?src-supplier=Avnet, ComponentLink7Description=https://datasheet.ciiva.com/30237/aoa0000ce2-30237990.pdf?src-supplier=Onlinecomponents.com, ComponentLink7URL=https://datasheet.ciiva.com/30237/aoa0000ce2-30237990.pdf?src-supplier=Onlinecomponents.com, ComponentLink8Description=https://datasheet.ciiva.com/17209/aoa0000ce2-17209369.pdf?src-supplier=Avnet+Europe, ComponentLink8URL=https://datasheet.ciiva.com/17209/aoa0000ce2-17209369.pdf?src-supplier=Avnet+Europe, Construction=Rectangular, Contact Plating=Tin, Depth=1.25mm, Features="Automotive AEC-Q200", Height=0.6mm, Length=2mm, Manufacturer Part Number=ERJ-6ENF51R0V, Military Standard=Not, Mount="Surface Mount", Number of Terminations=2, Packaging="Tape and Reel", Power Rating=125mW, Pricing 1="1=0,11000, 10=0,08300, 50=0,08300, 100=0,03200, 1000=0,01400, 2500=0,01300, 5000=0,01000, 10000=0,01000 (USD)", Radiation Hardening=No, REACH SVHC="No SVHC", RoHS=Yes, RoHS Compliant=Yes, Series=ERJ, Stock 1=33426, Supplier 1=Mouser, Technology="THICK FILM", Termination=SMD/SMT, Tolerance=1%, Voltage Rating (DC)=150V, Width=0.049inch
R5: "贴片电阻 100000Ω ± 1.00% 0.25W ± 100ppm/℃ 1206", Case Code (Imperial)=1206, Case Code (Metric)=3216, Manufacturer=Yageo, Max Operating Temperature=155°C, Max Power Dissipation=250mW, Min Operating Temperature=-55°C, Resistance=100kR, Resistance Tolerance=1%, Resistor Type="Thick Film", Supplier Part Number 1=603-RC1206FR-07100KL, Temperature Coefficient=100ppm/°C, Voltage Rating=200V, Case/Package=1206, Category="Chip SMD Resistors", Depth=1.6mm, Features="Moisture Resistant", Height=0.55mm, Lead Free="Lead Free", Length=3.1mm, Manufacturer Part Number=RC1206FR-07100KL, Number of Terminations=2, Packaging="Tape and Reel", Power Rating=250mW, Pricing 1="1=0,10000, 10=0,05200, 50=0,05200, 100=0,02200, 1000=0,01000, 10000=0,00500 (USD)", REACH SVHC="No SVHC", RoHS=Yes, RoHS Compliant=Yes, Series=RC, Size Code=1206, Stock 1=216861, Supplier 1=Mouser, Termination=SMD/SMT, Tolerance=1%
R6: "Res, 4K7, 1%, 0.5W, 1206, Thick Film;", Manufacturer=Vishay, Resistance=4.7K, Supplier Part Number 1=71-RCC12064K70FKEA, Category="Chip SMD Resistors", Manufacturer Part Number=RCC12064K70FKEA, Pricing 1="1=0,32000, 10=0,27600, 50=0,27600, 100=0,10800, 250=0,10700, 1000=0,04500, 5000=0,04300, 10000=0,04300 (USD)", RoHS=Yes, Stock 1=24548, Supplier 1=Mouser
R7: "Res Thick Film 1206 2 Ohm 5% 0.5W(1/2W) ±200ppm/C Pad SMD T/R", Case/Package=1206, Manufacturer=Yageo, Resistance=2R, Supplier Part Number 1=603-RC1206JR-7W2RL, Tolerance=5%, Category=Resistors, Manufacturer Part Number=RC1206JR-7W2RL, Pricing 1="1=0,19000, 10=0,15900, 50=0,15900, 100=0,06300, 1000=0,03100, 10000=0,02000 (USD)", RoHS=Yes, RoHS Compliant=Yes, Stock 1=5881, Supplier 1=Mouser
R8: "Res, AEC-Q200, 200K, 1%, 0.5W, 1206 Rohs Compliant: Yes", Manufacturer=Vishay, Resistance=200k, Supplier Part Number 1=71-RCC1206200KFKEA, Category="Chip SMD Resistors", Manufacturer Part Number=RCC1206200KFKEA, Pricing 1="1=0,32000, 10=0,27600, 50=0,27600, 100=0,10800, 250=0,10700, 1000=0,04500, 5000=0,04300, 10000=0,04300 (USD)", RoHS=Yes, Stock 1=7464, Supplier 1=Mouser
R9 R10 R11 R12: "Res, Aec-Q200, 2K2, 1%, 0.5W, 1206 Rohs Compliant: Yes", Manufacturer=Vishay, Resistance=2.2k, Supplier Part Number 1=71-RCC12062K20FKEA, Category="Chip SMD Resistors", Manufacturer Part Number=RCC12062K20FKEA, Pricing 1="1=0,32000, 10=0,27600, 50=0,27600, 100=0,10800, 250=0,10700, 1000=0,04500, 5000=0,04300, 10000=0,04300 (USD)", RoHS=No, Stock 1=10157, Supplier 1=Mouser
R13 R14: "Res Thick Film 0805 6.8K Ohm 0.5% 0.25W ±100ppm/°C Molded SMD Punched Carrier T/R", Case Code (Imperial)=0805, Case Code (Metric)=2012, Manufacturer=Panasonic, Max Operating Temperature=155°C, Min Operating Temperature=-55°C, Package Quantity=5000, Power Rating=500mW, Resistance=6.8kR, Resistor Type="Thick Film", Supplier Part Number 1=667-ERJ-P06D6801V, Temperature Coefficient=100ppm/°C, Tolerance=0.5%, Voltage Rating=400V, Case/Package=0805, Category="Chip SMD Resistors", ComponentLink1Description=https://datasheet.ciiva.com/24180/aoa0000ce4-64075-24180870.pdf?src-supplier=Mouser, ComponentLink1URL=https://datasheet.ciiva.com/24180/aoa0000ce4-64075-24180870.pdf?src-supplier=Mouser, Height=0.6mm, Length=2mm, Manufacturer Part Number=ERJ-P06D6801V, Mount="Surface Mount", Packaging="Tape and Reel", Pricing 1="1=0,31000, 10=0,27300, 50=0,27300, 100=0,10700, 1000=0,04500, 10000=0,03500 (USD)", RoHS=Yes, Stock 1=8417, Supplier 1=Mouser, Termination=SMD/SMT, Weight=0.000194oz, Width=1.2mm
R15 R16 R17 R18: "Res Thick Film 1206 10K Ohm 0.5% 0.33W ±100ppm/°C Molded SMD Punched Carrier T/R", Case Code (Imperial)=1206, Case Code (Metric)=3216, Manufacturer=Panasonic, Max Operating Temperature=155°C, Min Operating Temperature=-55°C, Package Quantity=5000, Power Rating=660mW, Resistance=10kR, Resistor Type="Thick Film", Supplier Part Number 1=667-ERJ-P08D1002V, Temperature Coefficient=100ppm/°C, Tolerance=0.5%, Voltage Rating=500V, Case/Package=1206, Category="Chip SMD Resistors", ComponentLink1Description=http://www.mouser.com/ds/2/315/AOA0000C291-1101061.pdf?src-supplier=Mouser, ComponentLink1URL=http://www.mouser.com/ds/2/315/AOA0000C291-1101061.pdf?src-supplier=Mouser, ComponentLink2Description=http://www.onlinecomponents.com/datasheet/erj-p08d1002v.aspx?p=44449323&src-supplier=Onlinecomponents.com, ComponentLink2URL=http://www.onlinecomponents.com/datasheet/erj-p08d1002v.aspx?p=44449323&src-supplier=Onlinecomponents.com, Height=0.6mm, Length=3.2mm, Manufacturer Part Number=ERJ-P08D1002V, Mount="Surface Mount", Packaging="Tape and Reel", Pricing 1="1=0,36000, 10=0,31400, 50=0,31400, 100=0,12600, 1000=0,06000, 10000=0,04000 (USD)", RoHS=Yes, Stock 1=4279, Supplier 1=Mouser, Width=1.6mm
U1: "PaPIRs MOTION SENSOR VZ series 170uA (White) 12m detection range", Case/Package=TO-5, Manufacturer=Panasonic, Max Operating Temperature=60°C, Max Supply Voltage=6V, Min Operating Temperature=-20°C, Min Supply Voltage=3V, Operating Supply Current=170uA, Output Voltage=500mV, Package Quantity=50, Supplier Part Number 1=769-EKMC1603111, Category="Motion Sensors", ComponentLink1Description=https://datasheet.ciiva.com/1314/1537854-1314623.pdf?src-supplier=Element14, ComponentLink1URL=https://datasheet.ciiva.com/1314/1537854-1314623.pdf?src-supplier=Element14, ComponentLink2Description=https://datasheet.ciiva.com/1314/1537854-1314441.pdf?src-supplier=Element14, ComponentLink2URL=https://datasheet.ciiva.com/1314/1537854-1314441.pdf?src-supplier=Element14, ComponentLink3Description=https://datasheet.ciiva.com/24392/papirs-ekmc-catalog-24392999.pdf?src-supplier=Onlinecomponents.com, ComponentLink3URL=https://datasheet.ciiva.com/24392/papirs-ekmc-catalog-24392999.pdf?src-supplier=Onlinecomponents.com, Lead Free="Lead Free", Manufacturer Part Number=EKMC1603111, Max Supply Voltage (DC)=6V, Min Supply Voltage (DC)=3V, Mount="Through Hole", Number of Pins=3, Output Current=170uA, Output Type=Digital, Packaging=Bulk, Pricing 1="1=13,18000, 10=10,76000, 50=9,95000, 100=8,33000, 250=8,06000, 500=7,80000, 1000=7,39000, 2500=7,15000, 5000=6,99000, 10000=7,39000 (USD)", REACH SVHC="No SVHC", RoHS=Yes, RoHS Compliant=Yes, Sensing Distance=472inch, Sensing Method="Infrared (IR)", Stock 1=270, Supplier 1=Mouser
U2: "Smoke Sensor - MQ-2", Manufacturer=SparkFun, Supplier Part Number 1=474-SEN-17049, Manufacturer Part Number=SEN-17049, Pricing 1="1=4,95000, 10=4,95000, 50=4,95000, 100=4,95000, 1000=4,95000, 10000=4,95000 (USD)", RoHS=No, Stock 1=63, Supplier 1=Mouser
U3: "Light to Digital Ambient Light Sensor Digital 0lux to 167000lux 8-Pin SMD T/R", Case/Package=SMD/SMT, Manufacturer="Vishay Semiconductors", Max Supply Voltage (DC)=3.6V, Min Supply Voltage (DC)=2.5V, Output Current=3mA, Supplier Part Number 1=78-VEML7700-TT, Category=Connectors, ComponentLink1Description=http://www.farnell.com/datasheets/2118175.pdf?_ga=2.74067602.1265931949.1503988629-1413671594.1503025027&src-supplier=Farnell, ComponentLink1URL=http://www.farnell.com/datasheets/2118175.pdf?_ga=2.74067602.1265931949.1503988629-1413671594.1503025027&src-supplier=Farnell, ComponentLink2Description=http://www.farnell.com/datasheets/2118175.pdf?src-supplier=Element14, ComponentLink2URL=http://www.farnell.com/datasheets/2118175.pdf?src-supplier=Element14, ComponentLink3Description=http://www.farnell.com/datasheets/2118175.pdf?_ga=2.74067602.1265931949.1503988629-1413671594.1503025027&src-supplier=Newark, ComponentLink3URL=http://www.farnell.com/datasheets/2118175.pdf?_ga=2.74067602.1265931949.1503988629-1413671594.1503025027&src-supplier=Newark, ComponentLink4Description=http://www.vishay.com/docs/84286/veml7700.pdf?src-supplier=Digi-Key, ComponentLink4URL=http://www.vishay.com/docs/84286/veml7700.pdf?src-supplier=Digi-Key, Manufacturer Part Number=VEML7700-TT, Mount="Surface Mount", Packaging="Tape and Reel", Pricing 1="1=2,13000, 10=1,50000, 50=1,50000, 100=1,16000, 1000=0,86300, 10000=0,86200 (USD)", REACH SVHC="No SVHC", RoHS=Yes, RoHS Compliant=Yes, Stock 1=23053, Supplier 1=Mouser
U4: "PCA9306 Series 3.3 V Dual Bidirectional Voltage-Level Translator - SOIC-8", Case/Package=SO, Manufacturer="NXP Semiconductors", Max Operating Temperature=85°C, Max Supply Voltage=5V, Min Operating Temperature=-40°C, Min Supply Voltage=1V, Package Quantity=2500, Supplier Part Number 1=771-PCA9306D-T, Category="Interface ICs", ComponentLink1Description=https://datasheet.ciiva.com/1898/pca9306-1898992.pdf?src-supplier=Digi-Key, ComponentLink1URL=https://datasheet.ciiva.com/1898/pca9306-1898992.pdf?src-supplier=Digi-Key, ComponentLink2Description=https://datasheet.ciiva.com/15095/getdatasheetpartid-468969-15095628.pdf?src-supplier=Verical, ComponentLink2URL=https://datasheet.ciiva.com/15095/getdatasheetpartid-468969-15095628.pdf?src-supplier=Verical, ComponentLink3Description=https://datasheet.ciiva.com/1504/1805226-1504148.pdf?src-supplier=Element14, ComponentLink3URL=https://datasheet.ciiva.com/1504/1805226-1504148.pdf?src-supplier=Element14, ComponentLink4Description=https://datasheet.ciiva.com/16219/pca9306-16219814.pdf?src-supplier=Future+Electronics, ComponentLink4URL=https://datasheet.ciiva.com/16219/pca9306-16219814.pdf?src-supplier=Future+Electronics, ComponentLink5Description=https://datasheet.ciiva.com/1611/1805226-1611291.pdf?src-supplier=Newark, ComponentLink5URL=https://datasheet.ciiva.com/1611/1805226-1611291.pdf?src-supplier=Newark, ComponentLink6Description=https://datasheet.ciiva.com/1898/pca9306-1898990.pdf?src-supplier=Digi-Key, ComponentLink6URL=https://datasheet.ciiva.com/1898/pca9306-1898990.pdf?src-supplier=Digi-Key, ComponentLink7Description=https://datasheet.ciiva.com/1898/pca9306-1898991.pdf?src-supplier=Digi-Key, ComponentLink7URL=https://datasheet.ciiva.com/1898/pca9306-1898991.pdf?src-supplier=Digi-Key, Interface=I2C,SMBus, Lead Free="Lead Free", Logic Function=Translator, Manufacturer Part Number=PCA9306D,118, Mount="Surface Mount", Number of Bits=2, Number of Channels=2, Number of Pins=8, Output Type=Voltage, Packaging="Tape and Reel", Pricing 1="1=0,96000, 10=0,84000, 50=0,84000, 100=0,64400, 250=0,59800, 500=0,50900, 1000=0,48000, 2500=0,47900, 10000=0,47900 (USD)", Propagation Delay=3.3ns, Radiation Hardening=No, REACH SVHC="No SVHC", RoHS=Yes, RoHS Compliant=Yes, Series=-, Stock 1=2085, Supplier 1=Mouser, Turn-On Delay Time=1.5ns
U5: "2-Channel Single ADC Delta-Sigma 3.75sps 18-bit Serial Automotive 8-Pin SOIC N Tube", Case/Package=SOIC, Manufacturer=Microchip, Max Operating Temperature=125°C, Max Supply Voltage=5.5V, Min Operating Temperature=-55°C, Min Supply Voltage=2.7V, Supplier Part Number 1=579-MCP3422A1-E/SN, Category="Analog to Digital Converters (ADCs)", ComponentLink1Description=https://datasheet.ciiva.com/6659/22088c-6659989.pdf?src-supplier=Digi-Key, ComponentLink1URL=https://datasheet.ciiva.com/6659/22088c-6659989.pdf?src-supplier=Digi-Key, Conversion Rate=3.75S/s, Input Type=DIFFERENTIAL, Interface=I2C,Serial,2-Wire, Manufacturer Part Number=MCP3422A1-E/SN, Mount="Surface Mount", Number of Bits=18, Number of Channels=2, Number of Converters=1, Number of Pins=8, Packaging=Rail/Tube, Pricing 1="1=3,76000, 10=3,76000, 50=3,14000, 100=2,92000, 1000=2,92000, 10000=2,92000 (USD)", Resolution=18b, RoHS=Yes, RoHS Compliant=Yes, Sampling Rate=3.75S/s, Stock 1=494, Supplier 1=Mouser

## Free pads (board coordinates)
  round 2.75 hole 2.75 unplated: MH1(3.5,3.5) MH2(61.5,3.5) MH3(3.5,26.5) MH4(61.5,26.5)

## Via types
v1: diameter 0.6, hole 0.3, Top Layer to Bottom Layer, 43 vias

## Nets (pads, with @x,y where several pads share a name; then routed paths per layer and width w, separated by ;. In a path a pad name is that pad's centre, name@x,y a point inside that pad or via, vN(x,y) a via of type N, cw(c..) or ccw(c..) an arc to the next point about the centre after c; other vN are vias at no path point)
3V3: C1.1 C2.1 C3.2 C4.2 C5.2 C6.1 C7.1 MIC1.2 MIC1.5 MIC2.5 P1.2 P1.18 P3.1 Q1.1 R9.1 R10.1 R17.1 U1.3 U3.2 U4.2 | length 37.5
  Top Layer w0.5: U3.2@5.164,14.35 5.264,14.25 6.523,14.25 6.673,14.1 v1(6.7,14.1) ; R17.1 37.65,13.865 38.025,14.24 38.025,14.39 38.03,14.395 v1(38.03,15.14)
  Bottom Layer w0.5: MIC1.2 4.241,6.899 v1(4.25,6.89) ; MIC1.5 5.88,9.88 6.33,10.33 7.57,10.33 C2.1 10.214,10.41 C4.2 10.28,11.7 v1(10.71,12.13) ; MIC2.5 5.063,21.929 5.074,21.94 5.79,21.94 6.28,22.43 C1.1 ; C7.1 5.156,14.834 5.659,14.331 6.442,14.331 6.673,14.1 v1(6.7,14.1) ; P1.2 7.65,24.51 C1.1 ; C3.2 9.966,22.43 C1.1 ; R10.1@13.88,16.745 R9.1 16.832,16.503 18.24,16.503 18.713,16.03 v1(18.74,16.03) ; C5.2 21.48,11.14 21.732,10.888 U1.3 ; v1@18.759,16.049 18.759,16.076 18.96,16.277 18.96,17.78 19.335,18.155 20.235,18.155 U4.2 ; Q1.1 36.73,13.84 v1(38.03,15.14)
5V: C9.1 C10.2 C11.1 P1.1 P1.3 P2.4 R8.2 R11.1 R12.1 R18.1 U2.1 U2.2 U2.3 U5.3 | length 40.1
  Top Layer w0.5: v1(32.67,12.47) 32.689,12.489 33.337,12.489 33.63,12.782 33.63,13.65 R18.1 ; U2.1 48.042,7.934 U2.2 51.929,7.934 53.32,9.325 U2.3
  Bottom Layer w0.5: P1.1 P1.3 ; C10.2 13.17,7.681 13.485,7.366 C9.1 16.231,6.985 U5.3 ; R12.1 R11.1 31.31,17.735 31.31,16.83 31.58,16.56 31.58,16.54 32.4,15.72 32.4,14.645 R8.2 32.675,12.475 v1(32.67,12.47) ; P2.4@33.26,2.28 33.26,7.32 v1(33.79,7.85) ; U2.3 53.369,4.305 C11.1
  other v1: 14.34,7.37 31.99,16.13
AIN: P2.2 R16.1 | length 3.8
  Top Layer w0.3: P2.2@38.34,2.28 38.34,5.935 R16.1
GDO0: P3.7
GDO2: P1.21 P3.6 | length 33.9
  Top Layer w0.3: P1.21 34.97,26.57 34.97,24.37 36.47,22.87 57.46,22.87 P3.6
GND: C1.2 C2.2 C3.1 C4.1 C5.1 C6.2 C7.2 C8.2 C9.2 C10.1 C11.2 MIC1.3 MIC2.2 MIC2.3 P1.5 P1.10 P1.13 P1.19 P1.26 P1.29 P1.33 P1.40 P2.3 P3.2 R5.2 R6.1 R7.2 R13.2 R14.2 U1.1 U3.3 U4.1 U5.2 U5.6 U5.8 | length 67.8
  Top Layer w0.5: U3.3@5.164,15.62 5.264,15.52 6.28,15.52 v1(6.7,15.1)
  Bottom Layer w0.3: v1(1.3,10.6) 2.204,11.504 C7.2 ; v1@1.7,7.1 v1(1.834,7.1) 3.055,8.321 3.502,8.768 3.502,8.831 3.651,8.98 ; v1(2.3,19.2) 2.8,19.2 3.69,20.09 MIC2.2 4.241,20.129 3.651,20.719 3.651,20.99 ; C2.2 10.194,7.61 C4.1 10.28,6.161 10.1,5.981 v1(10.1,5.9) ; C1.2 7.945,19.63 8.27,19.305 8.27,18.63 v1(8.8,18.1) 9.04,18.1 10.104,19.164 C3.1 ; v1@12,11.2 12.06,11.14 v1@12.14,11.14 ; v1(12.1,11.1) v1@12.14,11.14 ; R5.2 12.885,11.885 v1@12.14,11.14 ; C10.1 13.17,5.245 14.001,4.414 C9.2@15.674,4.414 ; v1(14.3,3.1) 14.36,3.1 C9.2@15.674,4.414 ; C5.1 v1@12.14,11.14 ; C9.2 C9.2@15.674,4.414 ; U1.1 19.71,15.874 19.71,16.785 19.91,16.985 U4.1 ; U5.2 v1(21.88,5.715) ; U5.8 23.15,4.445 v1(21.88,5.715) ; U5.6 23.15,6.985 v1(21.88,5.715) ; C8.2 27.312,12.257 28.033,12.257 v1(28.3,11.99) ; R13.2 v1(31.31,4.54) v1@31.32,4.53 ; R14.2 39.25,5.95 v1(41.5,8.2) ; R6.1 40.525,16.6 v1(42.6,16.6) ; C11.2 56.596,4.206 62.33,9.94 P3.2 ; P1.40 58.3,23.56 R7.2
  other v1: 6,18.9
GPIO23: P1.15 R5.1 U1.2 | length 22.2
  Bottom Layer w0.3: R5.1 15.695,13.62 16.773,13.62 17.163,13.23 20.658,13.23 U1.2 21.908,19.278 24.9,22.27 24.9,26.52 P1.15
GPIO24: P1.17 Q1.2 R17.2 | length 24.6
  Top Layer w0.3: R17.2 37.575,10.49 v1(38.97,10.49)
  Bottom Layer w0.3: P1.17 29.94,26.52 29.94,24.19 30.58,23.55 31.58,23.55 32.38,22.75 32.38,17.35 35.78,13.95 35.78,11.936 36.076,11.64 36.53,11.64 Q1.2 38.02,11.44 v1(38.97,10.49)
GPIO24_5V: P2.1 Q1.3 R18.2 | length 14.9
  Top Layer w0.5: R18.2 33.981,10.269 35.201,10.269 v1(35.22,10.25) 37.31,8.16 39.27,8.16 40.88,6.55 P2.1@40.88,2.28
  Bottom Layer w0.5: Q1.3 34.83,10.667 35.22,10.277 v1(35.22,10.25)
I2C_SCL: P1.6 R9.2 U3.1 U4.3 | length 25.8
  Top Layer w0.3: U3.1 7.159,13.08 7.679,13.6 v1(7.7,13.6) ; v1(12.37,17.94) 12.37,24.15 P1.6
  Bottom Layer w0.3: v1(7.7,13.6) 11.983,17.883 12.313,17.883 v1(12.37,17.94) 14.86,17.94 16.215,19.295 R9.2 ; R9.2@16.62,19.295 18.51,19.295 18.74,19.525 U4.3 U4.3@20.25,19.44
I2C_SCL_5V: R11.2 U4.6 U5.5 | length 16.2
  Bottom Layer w0.3: U5.5 23.95,18.78 24.56,19.39 25.65,19.39 U4.6 27.345,19.525 28.485,18.385 R11.2
I2C_SDA: P1.4 R10.2 U3.4 U4.4 | length 24.4
  Top Layer w0.3: U3.4 6.11,16.89 v1(6.83,16.17)
  Bottom Layer w0.3: v1(6.83,16.17) 8.511,16.17 9.331,16.99 10.283,16.99 11.76,18.467 11.76,19.33 ; P1.4 11.76,24.38 11.76,19.33 ; R10.2 13.67,19.295 11.795,19.295 11.76,19.33 ; R10.2@13.785,19.39 14.141,19.39 14.411,19.66 14.411,20.016 14.755,20.36 17.95,20.36 18.385,20.795 U4.4
I2C_SDA_5V: R12.2 U4.5 U5.4 | length 20.5
  Bottom Layer w0.3: U5.4 19.95,8.255 21.156,9.461 22.241,9.461 23.39,10.61 23.39,19.79 24.395,20.795 U4.5 25.8,20.81 27.03,20.81 27.15,20.93 28.11,20.93 28.485,21.305 R12.2
I2S_BCLK: P1.11 R2.1 | length 8.3
  Bottom Layer w0.3: R2.1 17.135,21.79 19.8,24.455 19.8,26.5 P1.11
I2S_DOUT: P1.37 R3.2 R4.2 | length 62.1
  Top Layer w0.3: R3.2 7.33,12.065 9.577,14.312 ; R4.2 7.38,16.539 9.577,14.342 9.577,14.312 ; v1(39.63,18.29) 39.6,18.32 18.692,18.32 14.683,14.312 9.577,14.312
  Bottom Layer w0.3: v1(39.63,18.29) 43.09,18.29 48.81,24.01 49.71,24.01 50.245,24.545 50.245,25.825 50.91,26.49 52.79,26.49 52.8,26.48 P1.37
I2S_WS: P1.36 R1.1 | length 3.8
  Bottom Layer w0.3: R1.1 51.51,21.865 51.51,25.19 P1.36
MQ2_OUT: R6.2 R15.1 U2.4 U2.6 | length 28.9
  Bottom Layer w0.3: R15.1 30.465,8.16 30.94,8.635 31.09,8.635 31.705,9.25 39.05,9.25 40.09,10.29 40.09,13.69 40.465,14.065 R6.2 42.335,14.065 44.313,16.043 U2.6 47.057,16.043 47.78,15.32 52.24,15.32 52.963,16.043 U2.4
NetC8_1: C8.1 R8.1 U4.7 U4.8 | length 7.8
  Bottom Layer w0.5: U4.7 U4.8 26.21,16.985 26.71,16.485 C8.1 29.85,14.661 30.125,14.386 R8.1
NetMIC1_1: MIC1.1 MIC2.1 R1.2 | length 66.3
  Top Layer w0.3: v1(4.73,18.8) 3.66,17.73 3.66,12.15 ; v1(6.09,7.54) 4.45,7.54 3.66,8.33 3.66,12.15 ; v1(6.12,12.12) 3.69,12.12 3.66,12.15 ; v1(9.11,12.71) 9.73,13.33 14.7,13.33 18.86,17.49 44.35,17.49 v1(44.9,18.04)
  Bottom Layer w0.3: v1(4.73,18.8) 4.73,18.881 5.063,19.214 MIC2.1 ; MIC1.1 5.063,8.041 5.174,7.93 5.619,7.93 6.009,7.54 v1(6.09,7.54) ; v1(6.12,12.12) 6.71,12.71 v1(9.11,12.71) ; v1(44.9,18.04) 44.957,18.097 45.062,18.097 48.505,21.54 R1.2
NetMIC1_4: MIC1.4 MIC2.4 R2.2 | length 65.1
  Top Layer w0.3: v1(3.78,19.04) 4.81,20.07 v1(4.81,22.98) ; v1(8.56,17.21) 16.52,17.21 18.29,18.98 31.26,18.98 31.98,19.7 31.98,20.67 31.47,21.18 16.82,21.18 v1(14.9,23.1)
  Bottom Layer w0.3: v1(3.78,19.04) 3.78,18.959 3.62,18.799 3.62,16.82 ; MIC1.4 4.241,9.919 3.62,10.54 3.62,16.82 ; MIC2.4 4.352,22.001 4.352,22.522 v1(4.81,22.98) ; v1(8.56,17.21) 8.17,16.82 3.62,16.82 ; v1(14.9,23.1) 14.9,21.795 R2.2
NetMIC1_6: MIC1.6 R3.1 | length 2.4
  Top Layer w0.3: v1(6,8.8) 7.085,8.8 R3.1
  Bottom Layer w0.3: MIC1.6 5.739,8.98 5.919,8.8 v1(6,8.8)
NetMIC2_6: MIC2.6 R4.1 | length 2.3
  Top Layer w0.3: v1(6.1,20.98) 7.365,20.98 R4.1
  Bottom Layer w0.3: MIC2.6 5.068,20.985 6.095,20.985 v1(6.1,20.98)
NetR7_1: R7.1 U2.5 | length 6.5
  Bottom Layer w0.5: U2.5 52.976,20.4 R7.1
NetR13_1: R13.1 R15.2 U5.1 | length 13.1
  Bottom Layer w0.3: U5.1 19.95,4.445 20.995,3.4 26.455,3.4 R13.1 27.595,7.28 27.015,7.86 R15.2
NetR14_1: R14.1 R16.2 U5.7 | length 14.5
  Top Layer w0.3: v1(26.33,5.98) 34.935,5.98 R16.2@34.96,6.005 ; v1(34.96,4.5) R16.2@34.96,6.005 ; R16.2 R16.2@34.96,6.005
  Bottom Layer w0.3: U5.7 26.065,5.715 v1(26.33,5.98) ; v1(34.96,4.5) 35.017,4.557 35.017,5.082 R14.1
SPI0_MISO: P1.22 P3.5 | length 32.9
  Top Layer w0.3: P1.22 33.961,25.039 33.961,24.189 36.55,21.6 56.73,21.6 P3.5
SPI0_MOSI: P1.20 P3.3 | length 36.6
  Top Layer w0.3: P1.20 35.68,20.78 39.18,20.78 40.63,19.33 55,19.33 P3.3
SPI0_SCLK: P1.24 P3.4 | length 30.8
  Top Layer w0.3: v1(40.9,20.36) 40.91,20.35 55.98,20.35 P3.4
  Bottom Layer w0.5: P1.24 36.31,24.977 40.9,20.387 v1(40.9,20.36)
SPI0_SS: P1.23 P3.8 | length 29.4
  Top Layer w0.3: P1.23 37.51,26.57 37.51,24.873 38.663,23.72 60.61,23.72 P3.8
pads on no net: MIC1. MIC2. P1.7 P1.8 P1.9 P1.12 P1.14 P1.16 P1.25 P1.27 P1.28 P1.30 P1.31 P1.32 P1.34 P1.35 P1.38 P1.39

## Polygon pours and split planes (outlines as drawn)
3V3 on L3_PWR "3V3_L03_P003" (solid, remove dead copper, pour order 3): 21.4,12.5 19.9,14 19.9,16 19.1,16.8 17.9,16.8 17.2,16.1 17.2,13.6 16.1,12.5 14.5,12.5 9.496,17.504 9.496,25.816 9.016,26.296 7.296,26.296 6.7,25.7 6.7,17.6 5.7,16.6 5.7,13.4 5.1,12.8 5.1,8 4.6,7.5 4,7.5 3.6,7.1 3.6,6.58 4.027,6.196 6.2,6.196 11.896,0.5 53.6,0.5 59.6,6.5 63,6.5 63.7,7.2 63.7,8.7 63.3,9.1 61.1,9.1 58.4,11.8 58.4,29.5 28.2,29.5 27.3,28.6 27.3,23.066 38.463,11.904 53.963,11.904 55.188,10.678 55.188,8.222 53.263,6.296 30.616,6.296 29.216,7.696 17.284,7.696 15.784,6.196 13.337,6.196 12.896,6.637 12.896,8.084 14.412,9.6 22.3,9.6 23.1,10.4 23.1,11.9 22.5,12.5
5V on L3_PWR "5V_L03_P004" (solid, pour order 4): 6.1,29.5 16.4,29.5 17.5,28.4 17.5,24.2 22.1,19.6 30.5,19.6 38.4,11.7 53.9,11.7 55,10.6 55,8.3 53.2,6.5 30.7,6.5 29.3,7.9 17.2,7.9 15.7,6.4 13.4,6.4 13.1,6.7 13.1,8 14.5,9.4 24,9.4 24.9,10.3 24.9,13.2 22.3,15.8 20.5,15.8 14.1,22.2 11.6,22.2 9.7,24.1 9.7,25.9 9.1,26.5 6.7,26.5 6.1,27.1
GND on Bottom Layer "GND_L04_P000" (solid, remove dead copper, pour order 0): 0.5,5.95 0.5,24.1 6.1,24.1 6.1,29.5 58.4,29.5 58.4,23.2 64.5,23.2 64.5,6.5 58.4,6.5 58.4,0.5 6.2,0.5 6.2,5.95
GND on Top Layer "GND_L01_P001" (solid, remove dead copper, pour order 1): 0.5,5.95 0.5,24.1 6.1,24.1 6.1,29.5 58.4,29.5 58.4,23.2 64.5,23.2 64.5,6.5 58.4,6.5 58.4,0.5 6.2,0.5 6.2,5.95
GND on L2_GND "GND_L02_P002" (solid, remove dead copper, pour order 2): 0.5,5.95 0.5,24.1 6.1,24.1 6.1,29.5 58.4,29.5 58.4,23.2 64.5,23.2 64.5,6.5 58.4,6.5 58.4,0.5 6.2,0.5 6.2,5.95

## Silkscreen, mask and mechanical layers (free items; w line width, h text height)
Top Overlay:
  text "L>" at 2.384,23.806 h1.2 r270
  text "RPi Room Monitor" at 59.954,22.446 h1 r270
  text "<R" at 2.384,8.016 h1.2 r270
Bottom Overlay:
  lines w0.2: 44.26,0.8 44.26,6.52 ; 46.17,0.78 46.17,6.51 ; 48.1,0.92 48.1,6.52 ; 42.39,0.77 50.05,0.77 50.05,2.35 42.39,2.35 42.39,0.77 ; 42.39,0.78 50.04,0.78 50.04,6.53 42.39,6.53 42.39,0.78
  text "JLCJLCJLCJLC" at 43.15,8.65 h1 r270
  text "RPi Room Monitor" at 59.954,7.554 h1 r270
  text "5V" at 42.804,2.824 h1 r270
  text "GND" at 44.714,2.804 h1 r270
  text "AIN" at 46.644,2.794 h1 r270
  text "IO18" at 48.594,2.774 h1 r270
  text "1" at 42.804,1.494 h1 r270
  text "2" at 44.714,1.244 h1 r270
  text "3" at 46.644,1.244 h1 r270
  text "4" at 48.584,1.244 h1 r270
Board Shape:
  the board outline again, w0.254
Mechanical 4:
  circle w0.127: c61.5,26.5 r3
  circle w0.127: c3.5,26.5 r3
  circle w0.127: c61.5,3.5 r3
  circle w0.127: c3.5,3.5 r3

## Dimensions
3.5,3.5 to 0,3 on Dimensions
3.5,26.5 to 3,30 on Dimensions
3.5,26.5 to 32.49,26.15 on Dimensions
3.5,26.5 to 61.5,26.5 on Dimensions
3.5,3.5 to 3,0 on Dimensions
3,0 to 3,30 on Dimensions
0,27 to 65,27 on Dimensions

## Text inside footprints (layer, text, board x,y; h text height)
P1: Bottom Overlay "1" at 5.32,27.76 h1.02 r270; Bottom Overlay "2" at 5.27,24.81 h1.02 r270; Bottom Overlay "40" at 58.68,24.28 h1.02 r270; Bottom Overlay "39" at 58.69,27.15 h1.02 r270